# EAGLE board bluenumi (EAGLE 5.06)
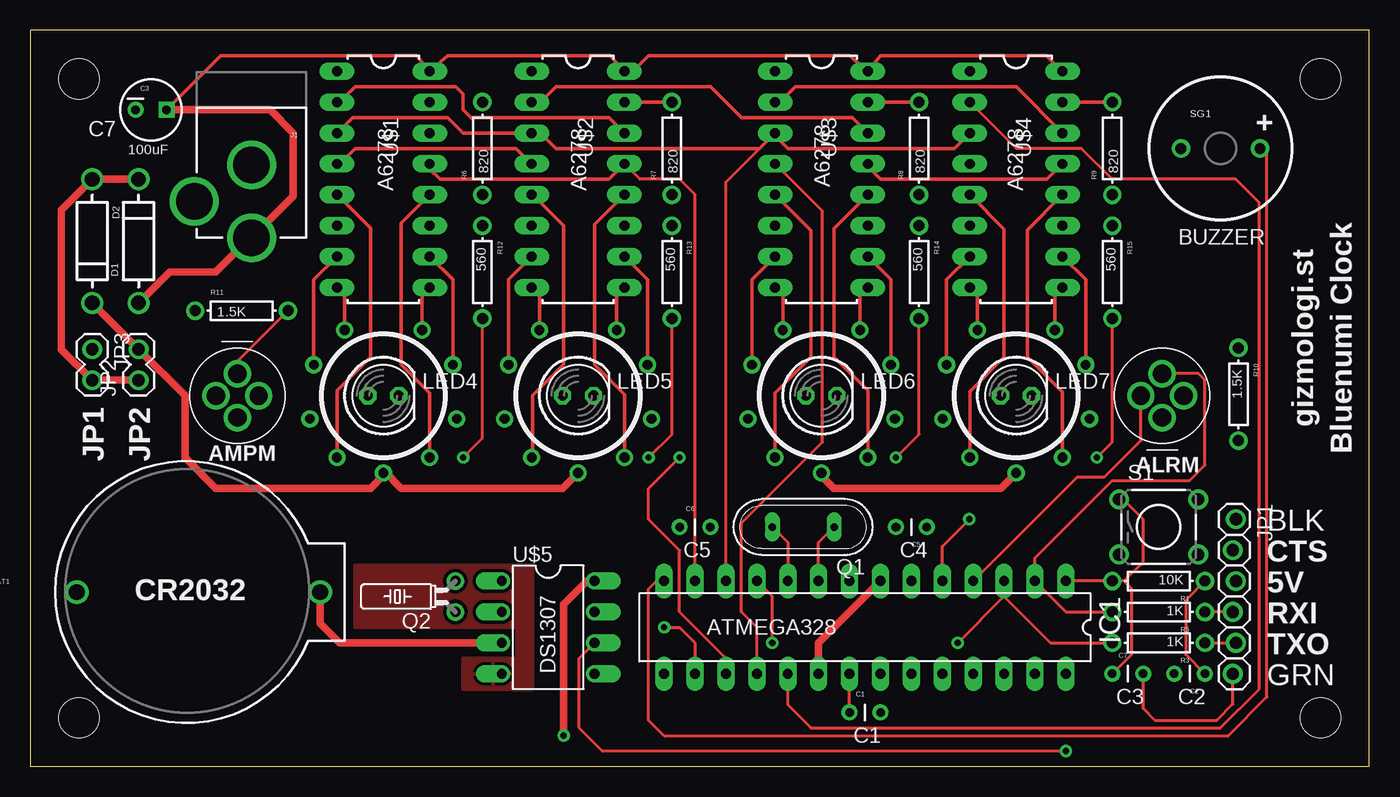
[diagram p0: board, top side]
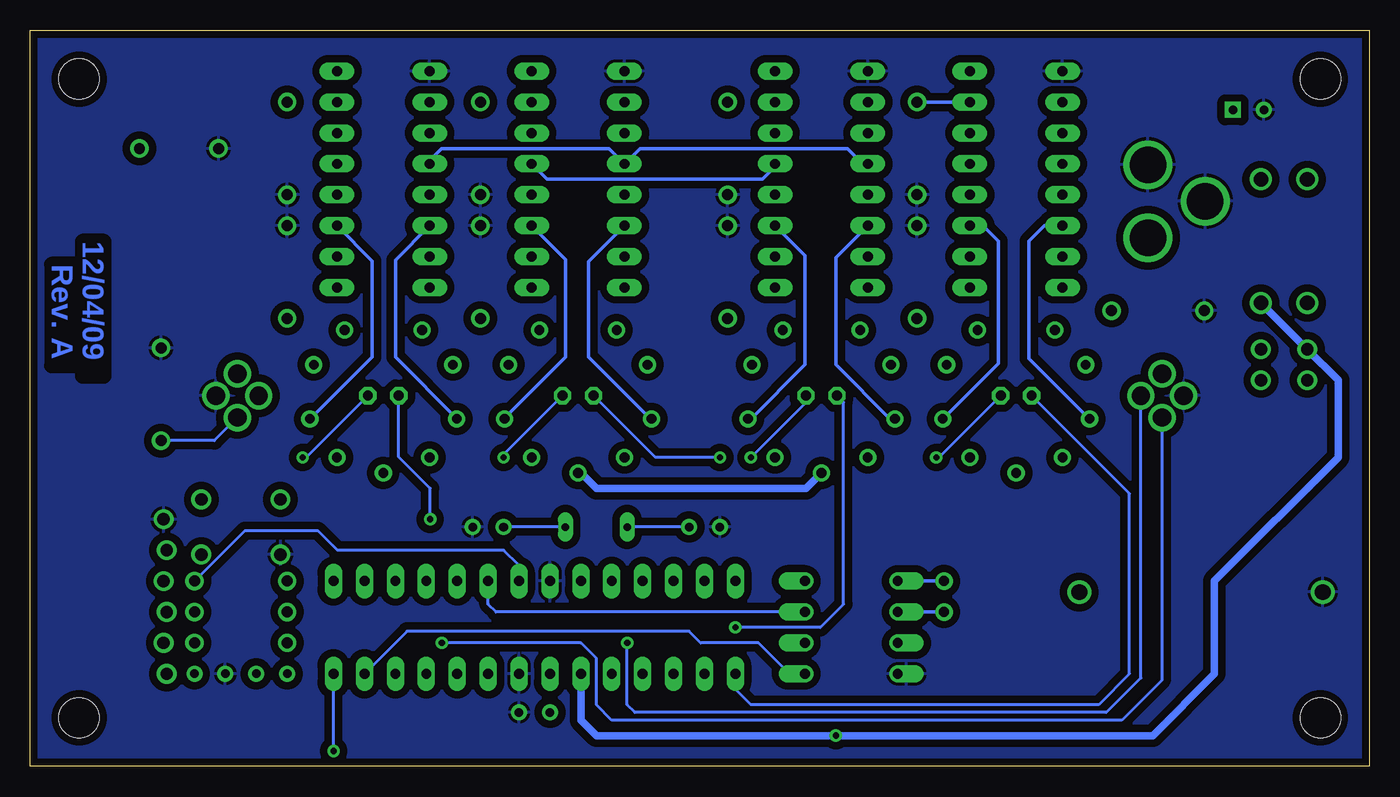
[diagram p1: board, bottom side, seen from below]

Size 110 x 60.5 mm. Coordinates in mm from the lower left corner, seen from the top.
Outline: 0,0 110,0 110,60.5 0,60.5 0,0
Copper layers (1*16): Top 0.035mm / dielectric 1.5mm / Bottom 0.035mm
Design rules "SparkFun": minimum track width 8mil, minimum drill 20mil, track to track 8mil, track to pad 8mil, pad to pad 8mil, via to via 8mil, smd to smd 8mil, copper to edge 10mil, drill to drill 8mil, minimum pad ring 12mil, minimum via ring 10mil, stop-mask expansion 4mil, vias tented up to drill 25mil, thermal gap 10mil

## Footprints (pad centres in the part's own frame; a part is rotated, then mirrored left to right if it is on the bottom)
BATTCOM_20MM_PTH = drill 1.3 round: 1 20,0; 2 0,0
CAP-PTH-SMALL = drill 0.7 round: 1 0,0; 2 2.54,0
CPOL-RADIAL-10UF-25V = drill 0.7 square: 1 1.27,0 | drill 0.7 round: 2 -1.27,0
DIODE-1N4001 = drill 1.2 round: A -5.08,0; C 5.08,0
DIL28-3 = drill 0.813 long: 1 -16.51,-3.81; 2 -13.97,-3.81; 3 -11.43,-3.81; 4 -8.89,-3.81; 5 -6.35,-3.81; 6 -3.81,-3.81; 7 -1.27,-3.81; 8 1.27,-3.81; 9 3.81,-3.81; 10 6.35,-3.81; 11 8.89,-3.81; 12 11.43,-3.81; 13 13.97,-3.81; 14 16.51,-3.81; 15 16.51,3.81; 16 13.97,3.81; 17 11.43,3.81; 18 8.89,3.81; 19 6.35,3.81; 20 3.81,3.81; 21 1.27,3.81; 22 -1.27,3.81; 23 -3.81,3.81; 24 -6.35,3.81; 25 -8.89,3.81; 26 -11.43,3.81; 27 -13.97,3.81; 28 -16.51,3.81
POWER_JACK_PTH = drill 2.997 round: GND 0,7.7; GNDBREAK 4.7,10.7; PWR 0,13.7
1X06_LOCK = drill 1.016 round: 1 0,0; 2 2.54,-0.254; 3 5.08,0; 4 7.62,-0.254; 5 10.16,0; 6 12.7,-0.254
1X02 = drill 1.016 round: 1 0,0; 2 2.54,0
LED5MM = drill 0.813 octagon: A -1.27,0; K 1.27,0
QS = drill 0.61 long: 1 -2.54,0; 2 2.54,0
TC26H = drill 0.813 round: 1 -1.27,0; 2 1.27,0
AXIAL-0.3 = drill 0.9 round: P$1 -3.81,0; P$2 3.81,0
TACTILE-PTH = drill 1.016 round: 1 -3.251,2.261; 2 3.251,2.261; 3 -3.251,-2.261; 4 3.251,-2.261
BUZZER-12MM-NS = drill 0.9 round: + 3.25,0; - -3.25,0
DIL16 = drill 0.813 long: 1 -8.89,-3.81; 2 -6.35,-3.81; 3 -3.81,-3.81; 4 -1.27,-3.81; 5 1.27,-3.81; 6 3.81,-3.81; 7 6.35,-3.81; 8 8.89,-3.81; 9 8.89,3.81; 10 6.35,3.81; 11 3.81,3.81; 12 1.27,3.81; 13 -1.27,3.81; 14 -3.81,3.81; 15 -6.35,3.81; 16 -8.89,3.81
DIL08 = drill 0.813 offset: 1 -3.81,-3.81; 2 -1.27,-3.81; 3 1.27,-3.81; 4 3.81,-3.81; 5 3.81,3.81; 6 1.27,3.81; 7 -1.27,3.81; 8 -3.81,3.81
LP1-PUSHBUTTON = drill 1.5 round: ANODE 0,1.803; CATHODE 0,-1.803; S1 -1.753,0; S2 1.753,0
STAND-OFF = hole 3.302: 0,0
9PINTUBE-WIDE = drill 0.8 round: A 3.175,5.397; ANODE 0,-6.35; B -3.175,5.397; C 6.032,-1.905; D -5.715,2.54; DP 3.81,-5.08; E -3.81,-5.08; F 5.715,2.54; G -6.032,-1.905

## Placement (x,y rotation side)
BAT1  [BATTCOM_20MM_PTH]  3.81,14.34 0 top
C1  0.1u  [CAP-PTH-SMALL]  67.31,4.45 0 top
C2  0.1u  [CAP-PTH-SMALL]  96.52,7.62 180 top
C3  100uF  [CPOL-RADIAL-10UF-25V]  9.91,53.98 0 top
C5  22p  [CAP-PTH-SMALL]  73.66,19.68 180 top
C6  22p  [CAP-PTH-SMALL]  53.34,19.68 0 top
C7  0.1u  [CAP-PTH-SMALL]  88.9,7.62 0 top
D1  [DIODE-1N4001]  8.89,43.18 90 top
D2  [DIODE-1N4001]  5.08,43.18 270 top
IC1  MEGA8-P  [DIL28-3]  68.58,11.43 180 top
J1  POWER_JACKPTH  [POWER_JACK_PTH]  18.17,57.15 180 top
JP1  [1X06_LOCK]  99.06,20.32 270 top
JP2  [1X02]  8.89,31.75 90 top
JP3  [1X02]  5.08,34.29 270 top
LED4  [LED5MM]  29,30.48 0 top
LED5  [LED5MM]  45,30.48 0 top
LED6  [LED5MM]  65,30.48 0 top
LED7  [LED5MM]  81,30.48 0 top
Q1  16Mhz  [QS]  63.5,19.68 180 top
Q2  [TC26H]  34.92,13.97 90 top
R1  10K  [AXIAL-0.3]  92.71,15.24 180 top
R3  1K  [AXIAL-0.3]  92.71,10.16 180 top
R5  1K  [AXIAL-0.3]  92.71,12.7 180 top
R6  820  [AXIAL-0.3]  37.15,50.8 90 top
R7  820  [AXIAL-0.3]  52.7,50.8 90 top
R8  820  [AXIAL-0.3]  73.03,50.8 90 top
R9  820  [AXIAL-0.3]  88.9,50.8 90 top
R10  1.5K  [AXIAL-0.3]  99.27,30.59 270 top
R11  1.5K  [AXIAL-0.3]  17.35,37.47 0 top
R12  560  [AXIAL-0.3]  37.15,40.64 270 top
R13  560  [AXIAL-0.3]  52.7,40.64 270 top
R14  560  [AXIAL-0.3]  73.03,40.64 270 top
R15  560  [AXIAL-0.3]  88.9,40.64 270 top
S1  [TACTILE-PTH]  92.71,19.68 0 top
SG1  BUZZERNS  [BUZZER-12MM-NS]  97.79,50.8 0 top
U$1  A6278EAT  [DIL16]  29,48.26 270 top
U$2  A6278EAT  [DIL16]  45,48.26 270 top
U$3  A6278EAT  [DIL16]  65,48.26 270 top
U$4  A6278EAT  [DIL16]  81,48.26 270 top
U$5  DS1307  [DIL08]  42.55,11.43 270 top
U$6  LP1-PUSHBUTTON  [LP1-PUSHBUTTON]  93,30.48 0 top
U$7  LP1-PUSHBUTTON  [LP1-PUSHBUTTON]  17,30.48 180 top
U$8  STAND-OFF  [STAND-OFF]  4,4 0 top
U$9  STAND-OFF  [STAND-OFF]  4,56.5 0 top
U$10  STAND-OFF  [STAND-OFF]  106,56.5 0 top
U$11  STAND-OFF  [STAND-OFF]  106,4 0 top
V1  [9PINTUBE-WIDE]  29,30.48 0 top
V2  [9PINTUBE-WIDE]  45,30.48 0 top
V3  [9PINTUBE-WIDE]  65,30.48 0 top
V4  [9PINTUBE-WIDE]  81,30.48 0 top

## Library data of the parts
BAT1 C1-C3 C5-C7 D1 D2 J1 JP1-JP3 R1 R3 R5-R15 S1 SG1 U$8-U$11 = SparkFun
IC1 = atmel
LED4-LED7 = led
Q1 = special
Q2 = crystal
U$1-U$7 V1-V4 = SeanVoisen

## Nets
BUZZER: IC1.14 SG1.+
CLK: IC1.12 U$1.3 U$2.3 U$3.3 U$4.3
DTR: C7.2 JP1.6
GND: BAT1.2 C1.2 C2.2 C3.2 C5.1 C6.1 IC1.8 IC1.22 J1.GND J1.GNDBREAK JP1.1 R6.P$1 R7.P$1 R8.P$1 R9.P$1 R10.P$1 R11.P$1 R12.P$1 R13.P$1 R14.P$1 R15.P$1 S1.3 SG1.- U$1.1 U$2.1 U$3.1 U$4.1 U$5.4 U$6.S2 U$7.S2
H0OUT: U$1.2 U$2.14
INPUT: IC1.19 U$4.2
LATCH: IC1.18 U$1.4 U$2.4 U$3.4 U$4.4
M0OUT: U$3.2 U$4.14
M1OUT: U$2.2 U$3.14
N$1: U$1.5 V1.E
N$2: U$1.6 V1.G
N$3: U$1.7 V1.D
N$4: U$1.8 V1.B
N$5: U$1.9 V1.A
N$6: U$1.10 V1.F
N$7: U$1.11 V1.C
N$8: U$1.12 V1.DP
N$9: R11.P$2 U$7.CATHODE
N$10: U$2.12 V2.DP
N$11: C5.2 IC1.9 Q1.1
N$12: U$2.6 V2.G
N$13: U$2.5 V2.E
N$14: U$2.7 V2.D
N$15: U$2.8 V2.B
N$16: U$2.9 V2.A
N$17: U$2.10 V2.F
N$18: U$2.11 V2.C
N$19: D2.C JP2.2 V1.ANODE V2.ANODE V3.ANODE V4.ANODE
N$20: D1.C D2.A JP2.1 JP3.2
N$22: C6.2 IC1.10 Q1.2
N$23: C7.1 IC1.1 R1.P$2 S1.1
N$24: C1.1 IC1.21
N$25: U$3.12 V3.DP
N$26: U$3.11 V3.C
N$27: U$3.10 V3.F
N$28: U$3.9 V3.A
N$29: U$3.8 V3.B
N$30: U$3.7 V3.D
N$31: U$3.6 V3.G
N$32: U$3.5 V3.E
N$33: R6.P$2 U$1.15
N$35: JP1.5 R3.P$1
N$36: JP1.4 R5.P$1
N$37: R7.P$2 U$2.15
N$38: R8.P$2 U$3.15
N$39: R9.P$2 U$4.15
N$40: R10.P$2 U$6.CATHODE
N$41: U$4.11 V4.C
N$42: U$4.10 V4.F
N$43: U$4.9 V4.A
N$44: U$4.8 V4.B
N$45: U$4.7 V4.D
N$46: U$4.6 V4.G
N$47: U$4.5 V4.E
N$48: LED4.K R12.P$2
N$49: U$4.12 V4.DP
N$50: LED5.K R13.P$2
N$51: LED6.K R14.P$2
N$52: LED7.K R15.P$2
N$54: BAT1.1 U$5.3
N$55: Q2.2 U$5.1
N$57: Q2.1 U$5.2
OE: IC1.13 U$1.13 U$2.13 U$3.13 U$4.13
PULSE: IC1.6 U$5.7
RX: IC1.2 R5.P$2 U$6.ANODE
SCL: IC1.28 U$5.6
SDA: IC1.27 U$5.5
SECONDS0: IC1.15 LED4.A
SECONDS1: IC1.16 LED5.A
SECONDS2: IC1.17 LED6.A
SECONDS3: IC1.5 LED7.A
SET_ALRM: IC1.11 U$7.S1
SET_TIME: IC1.4 U$6.S1
TX: IC1.3 R3.P$2 U$7.ANODE
VCC: C2.1 C3.1 D1.A IC1.7 IC1.20 J1.PWR JP3.1 R1.P$1 U$1.16 U$2.16 U$3.16 U$4.16 U$5.8

## Tracks (layer width: path | path; a pad name or v marks a point on that pad's centre or on a via)
BUZZER
  Top 0.254: IC1.14 51.44,15.24 50.8,14.61 50.8,3.81 52.07,2.54 98.42,2.54 101.6,5.71 101.6,50.24 SG1.+
CLK
  Top 0.254: IC1.12 57.15,48.03 60.44,51.32
  Top 0.305: U$4.3 75.92,50.8 62.23,50.8 61.19,51.84 U$3.3 60.44,51.32 59.92,50.8 43.18,50.8 41.91,52.07 U$2.3 35.56,52.07 34.29,53.34 26.46,53.34 U$1.3
DTR
  Top 0.254: JP1.6 98.81,5.14 97.47,3.81 92.39,3.81 91.44,4.76 C7.2
GND
  pour Bottom (isolate 0.61): 0,0 0,60.5 110,60.5 110,0
  pour Top (isolate 0.305): 40.01,8.89 35.56,8.89 35.56,6.35 41.27,6.35 41.27,16.51 26.67,16.51 26.67,11.43 40.01,11.43
H0OUT
  Top 0.305: U$1.2 25.4,54.61 26.67,55.88 34.92,55.88 35.56,55.24 35.56,53.98 36.2,53.34 47.54,53.34 U$2.14
INPUT
  Top 0.254: IC1.19 62.23,5.08 64.14,3.17 97.79,3.17 100.97,6.35 100.97,46.35 99.06,48.26 88.9,48.26 86.36,50.8 81,50.8 U$4.2
LATCH
  Top 0.254: IC1.18 59.69,11.43 58.42,12.7 58.42,20 65.09,26.67 65.09,45.63 U$3.4
  Top 0.305: U$1.4 25.4,49.53 26.67,50.8 39.92,50.8 U$2.4
  Bottom 0.305: U$4.4 77.19,49.81 76.2,50.8 62.46,50.8 U$3.4 59.92,50.8 42.86,50.8 41.59,49.53 U$2.4
M0OUT
  Top 0.305: U$3.2 61.59,54.61 62.87,55.88 81,55.88 U$4.14
M1OUT
  Top 0.305: U$2.2 41.91,54.61 43.18,55.88 55.88,55.88 58.42,53.34 67.54,53.34 U$3.14
N$1
  Top 0.305: V1.E 25.19,30.91 27.94,33.66 27.94,44.24 U$1.5
N$2
  Bottom 0.305: U$1.6 26.67,44.45 27.94,43.18 27.94,33.55 V1.G
N$3
  Top 0.305: V1.D 23.29,40.01 U$1.7
N$4
  Top 0.305: V1.B 25.82,38.73 U$1.8
N$5
  Top 0.305: V1.A 32.17,38.73 U$1.9
N$6
  Top 0.305: V1.F 34.72,40.01 U$1.10
N$7
  Bottom 0.305: U$1.11 31.75,44.45 30.48,43.18 30.48,33.13 V1.C
N$8
  Top 0.305: V1.DP 32.81,30.69 30.48,33.02 30.48,44.66 U$1.12
N$9
  Top 0.254: U$7.CATHODE 17,33.3 R11.P$2
N$10
  Top 0.305: V2.DP 48.81,30.57 46.35,33.02 46.35,44.53 U$2.12
N$11
  Top 0.254: IC1.9 64.77,18.41 Q1.1
  Bottom 0.254: Q1.1 C5.2
N$12
  Bottom 0.305: V2.G 39.37,28.57 43.81,33.02 43.81,41.83 U$2.6
N$13
  Top 0.305: U$2.5 41.27,46.99 43.81,44.45 43.81,33.02 41.27,30.48 41.27,25.48 V2.E
N$14
  Top 0.305: V2.D 39.28,40.01 U$2.7
N$15
  Top 0.305: V2.B 41.83,38.73 U$2.8
N$16
  Top 0.305: V2.A 48.17,38.73 U$2.9
N$17
  Top 0.305: V2.F 50.72,40.01 U$2.10
N$18
  Bottom 0.305: V2.C 50.8,28.57 46.35,33.02 46.35,41.99 U$2.11
N$19
  Top 0.61: D2.C JP2.2 12.7,30.48 12.7,25.4 15.24,22.86 27.94,22.86 29,23.92 V1.ANODE 29.21,24.13 30.48,22.86 43.73,22.86 V2.ANODE | V3.ANODE 65,23.9 66.04,22.86 79.73,22.86 V4.ANODE
  Bottom 0.61: V2.ANODE 46.27,22.86 63.5,22.86 64.77,24.13 V3.ANODE
N$20
  Top 0.61: D1.C D2.A 2.54,45.72 2.54,34.29 JP3.2 JP2.1
N$22
  Top 0.254: IC1.10 62.23,18.41 Q1.2
  Bottom 0.254: C6.2 Q1.2
N$23
  Top 0.254: S1.1 89.81,21.95 91.44,20.32 91.44,16.83 89.85,15.24 | 89.85,15.24 R1.P$2 IC1.1 | C7.1 90.49,9.21 90.49,14.61 89.85,15.24
N$24
  Top 0.254: C1.1 IC1.21
N$25
  Top 0.305: V3.DP 68.81,30.89 66.04,33.66 66.04,44.22 U$3.12
N$26
  Bottom 0.305: V3.C 71.03,28.66 66.04,33.66 66.04,41.68 U$3.11
N$27
  Top 0.305: V3.F 70.72,40.01 U$3.10
N$28
  Top 0.305: V3.A 68.17,38.73 U$3.9
N$29
  Top 0.305: V3.B 61.83,38.73 U$3.8
N$30
  Top 0.305: V3.D 59.28,40.01 U$3.7
N$31
  Bottom 0.305: V3.G 59.05,28.57 64.14,33.66 64.14,41.51 U$3.6
N$32
  Top 0.305: V3.E 61.19,30.71 64.14,33.66 64.14,44.05 U$3.5
N$33
  Bottom 0.305: U$1.15 R6.P$2
N$35
  Top 0.254: R3.P$1 JP1.5
N$36
  Top 0.254: JP1.4 R5.P$1
N$37
  Top 0.305: U$2.15 R7.P$2
N$38
  Top 0.305: U$3.15 R8.P$2
N$39
  Top 0.305: U$4.15 R9.P$2
N$40
  Bottom 0.254: R10.P$2 94.9,26.78 U$6.CATHODE
N$41
  Bottom 0.305: V4.C 87,28.57 81.92,33.66 81.92,41.55 U$4.11
N$42
  Top 0.305: V4.F 86.72,40.01 U$4.10
N$43
  Top 0.305: V4.A 84.17,38.73 U$4.9
N$44
  Top 0.305: V4.B 77.83,38.73 U$4.8
N$45
  Top 0.305: V4.D 75.28,40.01 U$4.7
N$46
  Bottom 0.305: V4.G 74.97,28.61 80.01,33.66 80.01,41.63 U$4.6
N$47
  Top 0.305: V4.E 77.19,30.84 80.01,33.66 80.01,44.17 U$4.5
N$48  (via drill 0.51)
  Top 0.254: R12.P$2 37.15,26.99 v35.56,25.4
  Bottom 0.254: v35.56,25.4 35.35,25.4 LED4.K
N$49
  Top 0.305: V4.DP 84.81,30.76 81.92,33.66 81.92,44.09 U$4.12
N$50  (via drill 0.51)
  Top 0.254: R13.P$2 52.7,27.3 v50.8,25.4
  Bottom 0.254: v50.8,25.4 46.27,29.93 LED5.K
N$51  (via drill 0.51)
  Top 0.254: R14.P$2 73.03,27.3 v71.12,25.4
  Bottom 0.254: v71.12,25.4 71.12,25.63 LED6.K
N$52  (via drill 0.51)
  Top 0.254: R15.P$2 88.9,26.67 v87.63,25.4
  Bottom 0.254: v87.63,25.4 87.35,25.4 LED7.K
N$54
  Top 0.61: BAT1.1 23.81,11.75 25.4,10.16 U$5.3
N$55
  Bottom 0.305: Q2.2 U$5.1
N$57
  Bottom 0.305: Q2.1 U$5.2
OE
  Top 0.254: IC1.13 54.61,46.99 53.34,48.26 50.08,48.26 U$2.13
  Top 0.305: U$1.13 32.81,49.1 33.66,48.26 47.54,48.26 U$2.13 | U$3.13 68.81,49.3 69.85,48.26 83.54,48.26 U$4.13
  Bottom 0.305: U$2.13 48.81,49.3 49.85,48.26 67.54,48.26 U$3.13
PULSE
  Bottom 0.254: U$5.7 71.75,12.7 72.39,13.34 IC1.6
RX
  Top 0.254: R5.P$2 85.09,12.7 IC1.2 82.55,17.14 88.9,23.5 95.25,23.5 96.52,24.77 96.52,31.75 95.99,32.28 U$6.ANODE
SCL  (via drill 0.51)
  Top 0.254: U$5.6 45.09,8.89 45.09,3.17 46.99,1.27 v85.09,1.27
  Bottom 0.254: v85.09,1.27 IC1.28
SDA
  Bottom 0.254: IC1.27 79.06,11.11 55.88,11.11 54.93,10.16 50.16,10.16 47.62,7.62 U$5.5
SECONDS0
  Bottom 0.254: IC1.15 52.07,6.35 50.8,5.08 22.23,5.08 19.68,7.62 19.68,22.43 LED4.A
SECONDS1  (via drill 0.51)
  Top 0.254: IC1.16 54.61,10.16 53.34,11.43 v52.07,11.43
  Bottom 0.254: v52.07,11.43 45.09,11.43 43.18,13.34 43.18,29.93 LED5.A
SECONDS2  (via drill 0.51)
  Top 0.254: IC1.17 57.15,8.89 53.34,12.7 53.34,17.78 50.8,20.32 50.8,22.86 v53.34,25.4
  Bottom 0.254: v53.34,25.4 58.65,25.4 LED6.A
SECONDS3  (via drill 0.51)
  Top 0.254: v77.15,20.32 74.93,18.1 IC1.5
  Bottom 0.254: LED7.A 79.73,25.44 77.15,22.86 v77.15,20.32
SET_ALRM  (via drill 0.51)
  Top 0.254: v60.96,10.16 60.96,13.97 IC1.11
  Bottom 0.254: U$7.S1 18.75,7.28 21.59,4.45 60.33,4.45 60.96,5.08 v60.96,10.16
SET_TIME
  Top 0.254: U$6.S1 91.25,26.8 88.27,23.81 86.04,23.81 IC1.4
TX  (via drill 0.51)
  Top 0.254: 80.01,13.97 IC1.3 | v76.2,10.16 80.01,13.97 | R3.P$2 83.82,10.16 80.01,13.97
  Bottom 0.254: U$7.ANODE 17,7.13 20.32,3.81 62.23,3.81 63.5,5.08 63.5,8.89 64.77,10.16 v76.2,10.16
VCC  (via drill 0.51)
  Top 0.254: R1.P$1 94.93,13.65 94.93,9.21 C2.1
  Top 0.305: U$4.16 83.5,58.42 69.85,58.42 U$3.16 67.31,58.42 50.8,58.42 49.53,57.15 U$2.16 47.62,58.42 34.29,58.42 U$1.16 31.75,58.42 15.63,58.42 C3.1
  Top 0.61: D1.A 11.43,40.64 15.24,40.64 18.05,43.45 J1.PWR 21.59,46.87 21.59,52.07 19.68,53.98 C3.1 | IC1.20 64.77,10.16 IC1.7 | U$5.8 45.72,15.24 43.81,13.34 v43.81,2.54
  Bottom 0.254: IC1.7 69.85,16.51 71.12,17.78 84.77,17.78 86.36,19.37 92.39,19.37 R1.P$1
  Bottom 0.61: D1.A JP3.1 2.54,31.75 2.54,25.4 12.7,15.24 12.7,7.62 17.78,2.54 v43.81,2.54 63.5,2.54 64.77,3.81 IC1.20

## Text on the board
Bottom: 12/04/09 | Rev. A
tPlace: C7 | + | A6278 | A6278 | A6278 | A6278 | BUZZER | gizmologi.st | Bluenumi Clock | JP1 | JP2 | AMPM | ALRM | BLK | C5 | C4 | CTS | CR2032 | 5V | RXI | ATMEGA328 | TXO | DS1307 | GRN | C3 | C2 | C1